# Altium PCB BOOST_PCB1.PcbDoc
Units mm, origin at the board's own origin, x right, y up, seen from the top; angles counter-clockwise.
Board outline 152.4 x 101.6 mm, 2 copper layers (Top Layer, Bottom Layer); 23 components, 16 nets, 64 pads, 0 vias.
Unrouted connection lines stored in the file: 40.
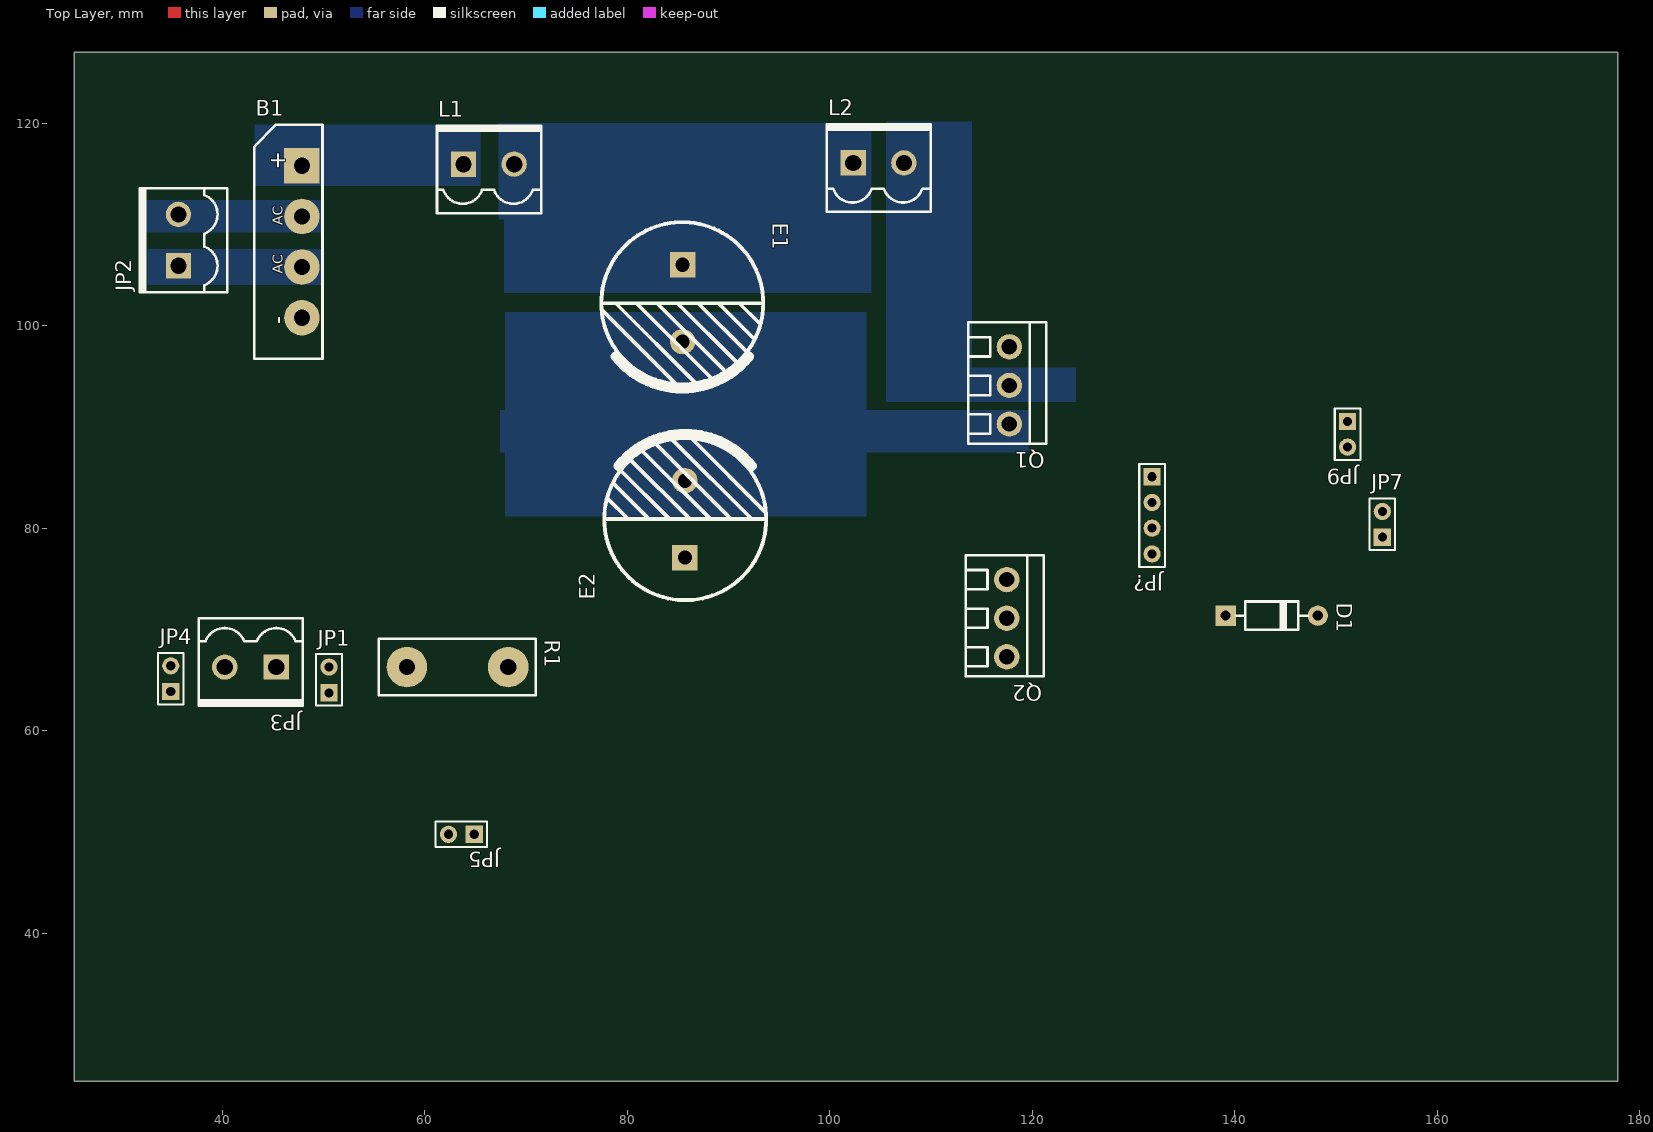
[diagram p0: Top Layer view]
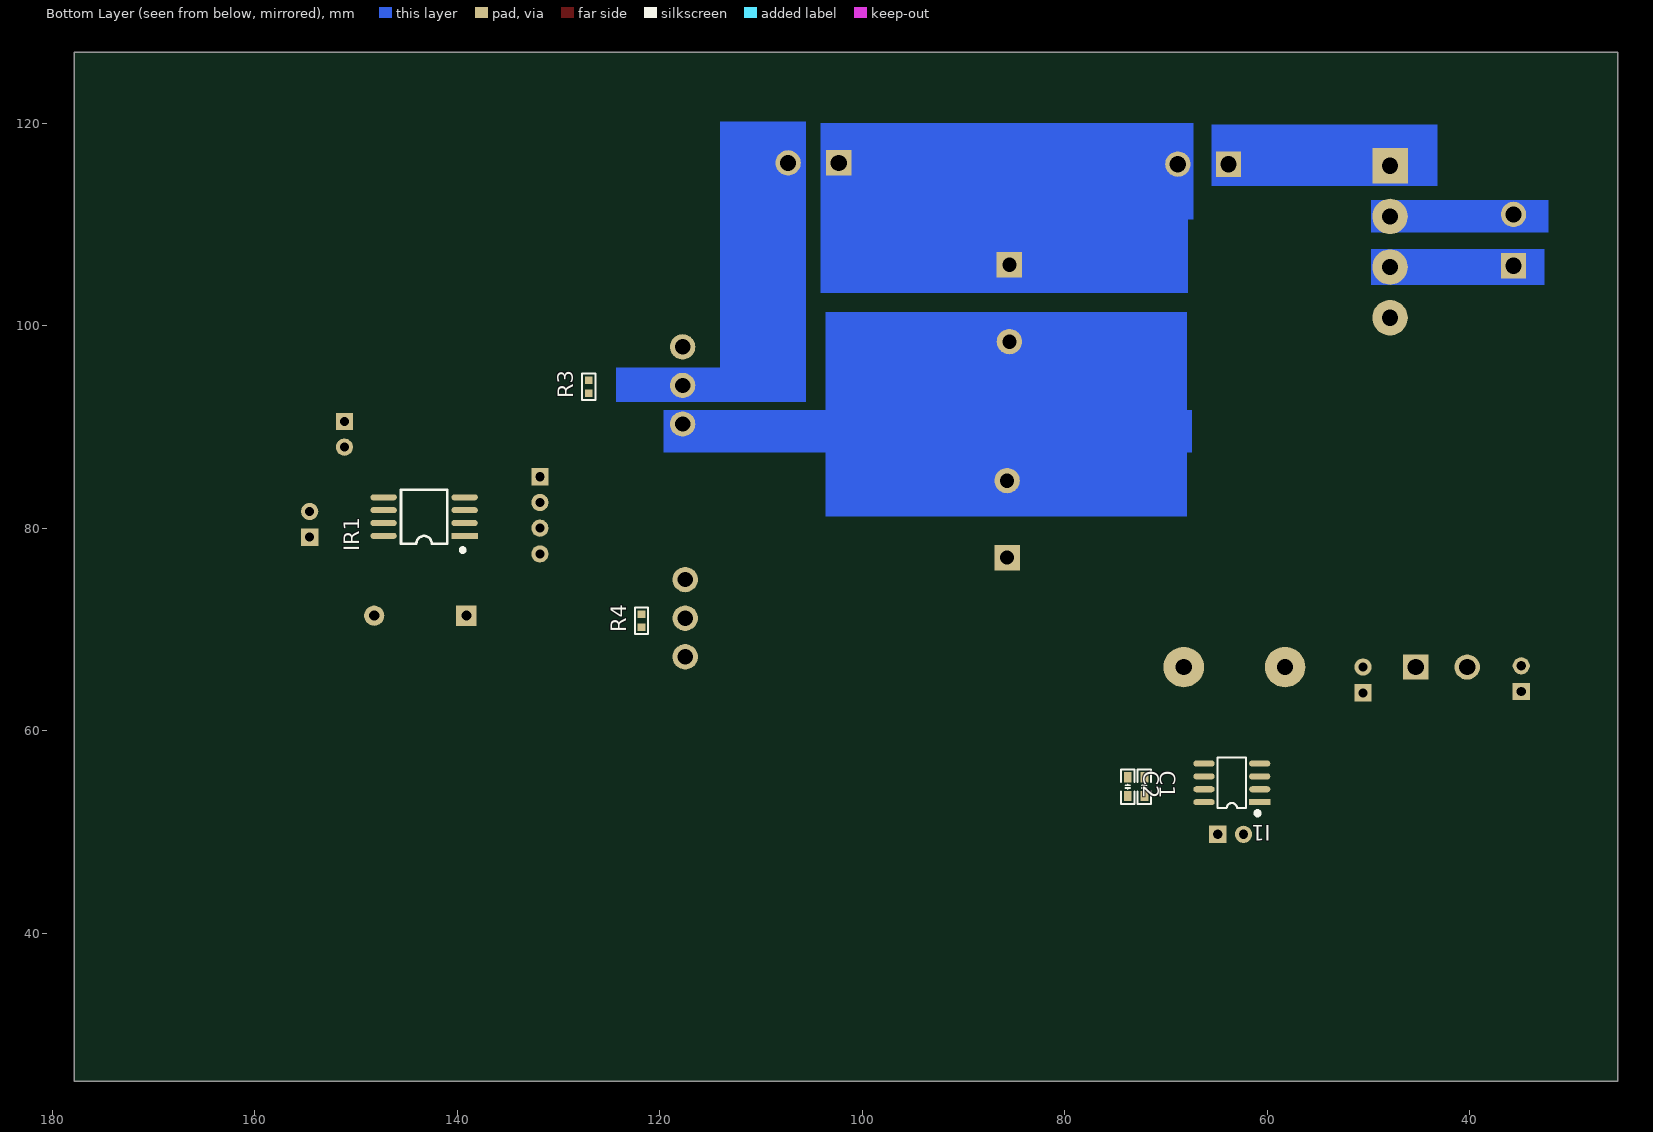
[diagram p1: Bottom Layer view, seen from below]

## Layer stack, top to bottom
Top Solder: solder mask 0.0102, Solder Resist, Dk 3.5
Top Layer: signal copper 0.0356
Dielectric 1: dielectric 0.32, FR-4, Dk 4.8
Bottom Layer: signal copper 0.0356
Bottom Solder: solder mask 0.0102, Solder Resist, Dk 3.5

## Board outline
25.4,25.4 177.8,25.4 177.8,127 25.4,127

## Design rules (kind name [scope] priority, off if disabled: settings)
Clearance [All] p1: gap=0.7
PolygonConnect [All] p1: connectstyle=Relief reliefconductorwidth=0.254 reliefentries=4 polygonreliefangle="90 Angle" airgapwidth=0.254
RoutingVias [All] p1: holewidth=0.711 width=1.27 viastyle="Through Hole" minholewidth=0.711 minwidth=1.27 maxholewidth=0.711 maxwidth=1.27
SolderMaskExpansion [All] p1: expansion=0.102
Width [All] p1: maxlimit=100 minlimit=1 preferedwidth=10
30 further rules are at their usual default settings.

## Components (designator, comment, footprint, x,y, rotation, side; value= is the part's Value field where it differs from the comment)
B1 "KBU808" KBU 47.879,108.291 r90 top
C1 "0.1u" "C 0603_M" 72.136,54.483 r270 bottom
C2 "10u" "C 0603_M" 73.787,54.483 r270 bottom
D1 "1N4007" DO-41 143.637,71.374 r0 top
E1 "10uF/16V" "CAP 7.5*16*25 - BK" 85.433,102.225 r270 top
E2 "4700uF/16V" "CAP 7.5*16*25 - BK" 85.725,80.899 r90 top
I1 "INA282" SOP8_M 63.5,54.864 r0 bottom
IR1 "IR2101/2303" SOP8W_M 143.256,81.153 r0 bottom
JP1 "HDR-1X2" HDR2.54-LI-2P 50.546,65.024 r90 top
JP2 "HDR-1X2" KF2EDGK5.08-LI-2P 35.687,108.458 r90 top
JP3 "HDR-1X2" KF2EDGK5.08-LI-2P 42.799,66.294 r180 top
JP4 "HDR-1X2" HDR2.54-LI-2P 34.925,65.151 r90 top
JP5 "HDR-1X2" HDR2.54-LI-2P 63.627,49.784 r180 top
JP7 "HDR-1X2" HDR2.54-LI-2P 154.559,80.391 r90 top
JP9 "HDR-1X2" HDR2.54-LI-2P 151.13,89.281 r270 top
JP? "HDR-1X4" HDR2.54-LI-4P 131.826,81.28 r270 top
L1 "33uH" KF2EDGK5.0-LI-2P 66.334,115.951 r0 top
L2 "33uH" KF2EDGK5.0-LI-2P 104.815,116.078 r0 top
Q1 "IRF840" KF128-3.81-3P 117.729,94.107 r270 top
Q2 "IRF840" KF128-3.81-3P 117.475,71.12 r270 top
R1 "0.01R" RX10-18*15*5 63.246,66.294 r0 top
R3 "10K" "R 0603_L" 127,93.98 r90 bottom
R4 "10K" "R 0603_L" 121.793,70.866 r90 bottom

## Footprints (in the part's own frame and the unit in brackets; to place one, negate y for a bottom-side part, rotate by r counter-clockwise, add the part's x,y. Pads: shape width x height; smd on the part's side, far side on the other; paste and mask are expansions set on the pad)
"C 0603_M" [mil] "无极性贴片电容"
  rect 40x30 smd: 1(-36.5,0) 2(36.5,0)
  silkscreen extent -68,-26 68,26, body extent -31,-16 31,16, height 32
"CAP 7.5*16*25 - BK" [mm] "脚距7.5mm直径16mm高度25mm"
  rect 2.5x2.5 hole 1.4: 1(-3.8,0.038)
  round 2.5 hole 1.4: 2(3.8,0.038)
  silkscreen extent -8,-8 8.42,8, body extent -8,-8 8.01,8, height 25.04
DO-41 [mm] "2.6*9.1mm(直径，脚距）"
  rect 2x2 hole 1: 1(-4.55,0)
  round 2 hole 1: 2(4.55,0)
  silkscreen extent -3.56,-1.4 3.56,1.4, body extent -4.92,-1.29 4.98,1.31, height 2.65
HDR2.54-LI-2P [mm] "排针，2脚"
  rect 1.7x1.7 hole 0.9: 1(-1.27,0)
  round 1.7 hole 0.9: 2(1.27,0)
  silkscreen extent -2.54,-1.27 2.54,1.27, body extent -2.54,-1.27 2.54,1.27, height 8.5
HDR2.54-LI-4P [mm] "排针，4脚"
  rect 1.7x1.7 hole 0.9: 1(-3.81,0)
  round 1.7 hole 0.9: 2(-1.27,0) 3(1.27,0) 4(3.81,0)
  silkscreen extent -5.08,-1.27 5.08,1.27, body extent -5.08,-1.27 5.08,1.27, height 8.5
KBU [mm] "23*6.6*19.1mm(长宽高)"
  round 3.5 hole 1.6: AC1(2.5,0) AC2(-2.5,0) DC-(-7.5,0)
  rect 3.5x3.5 hole 1.6: DC+(7.5,0)
  silkscreen extent -11.56,-2.03 11.56,4.7, body extent -11.5,-2 11.5,4.6, height 19
KF2EDGK5.0-LI-2P [mm] "立插端子"
  rect 2.5x2.5 hole 1.6: 1(-2.5,0)
  round 2.5 hole 1.6: 2(2.5,0)
  silkscreen extent -5.12,-4.83 5.17,3.81, body extent -5.04,-4.75 5.04,3.75, height 11.25
KF2EDGK5.08-LI-2P [mm] "立插端子"
  rect 2.5x2.5 hole 1.6: 1(-2.54,0)
  round 2.5 hole 1.6: 2(2.54,0)
  silkscreen extent -5.16,-4.83 5.13,3.81, body extent -5.08,-4.75 5.08,3.75, height 11.25
KF128-3.81-3P [mm] "螺钉式接线端子，脚距3.81mm"
  round 2.5 hole 1.5: 1(-3.81,0) 2(0,0) 3(3.81,0)
  silkscreen extent -6.22,-4.04 5.74,3.63, body extent -6.21,-3.9 5.72,3.5, height 8.55
"R 0603_L" [mil] "1/10W贴片电阻"
  rect 30x30 smd: 1(-25.59,0) 2(25.59,0)
  silkscreen extent -51,-26 51,26, body extent -31,-16 31,16, height 16
RX10-18*15*5 [mm] "18*15*5MM(长*宽*厚)"
  round 4 hole 1.6: 1(-5,0) 2(5,0)
  silkscreen extent -7.79,-2.79 7.7,2.79, body extent -7.5,-2.5 7.5,2.5, height 18.05
SOP8_M [mm] "5*6*1.8mm（长宽高）"
  rect 2.1x0.6 smd: 1(-2.75,1.905)
  oval 2.1x0.6 smd: 2(-2.75,0.635) 3(-2.75,-0.635) 4(-2.75,-1.905) 5(2.75,-1.905) 6(2.75,-0.635) 7(2.75,0.635) 8(2.75,1.905)
  silkscreen extent -2.69,-2.5 1.4,3.15, body extent -3,-2.5 3,2.5, height 1.9
SOP8W_M [mm] "5.3*8.3*1.8mm（长宽高）"
  rect 2.6x0.6 smd: 1(-4,1.905)
  oval 2.6x0.6 smd: 2(-4,0.635) 3(-4,-0.635) 4(-4,-1.905) 5(4,-1.905) 6(4,-0.635) 7(4,0.635) 8(4,1.905)
  silkscreen extent -3.94,-2.67 2.29,3.43, body extent -3.94,-2.64 3.94,2.64, height 1.9

## Part data
B1: library part KBU, "800V/8A整流桥"
C1 C2: library part C, "无极性贴片电容"
D1: "整流二极管"
E1 E2: library part C-CAP, "直插电解电容"
JP1 JP2 JP3 JP4 JP5 JP7 JP9: library part "Header 2", "2P接插件"
JP?: library part "Header 4", "4P接插件"
L1 L2: library part L-MR, "功率磁环电感"
Q1 Q2: "N沟场效应管"
R1: library part RX, "大功率电阻"
R3 R4: library part R, "贴片电阻"

## Nets (pads, with @x,y where several pads share a name; then routed paths per layer and width w, separated by ;. In a path a pad name is that pad's centre, name@x,y a point inside that pad or via, vN(x,y) a via of type N, cw(c..) or ccw(c..) an arc to the next point about the centre after c; other vN are vias at no path point)
+IN: E2.1 I1.8 JP5.1 Q2.2 R1.2
-IN: I1.1 JP1.1 JP1.2 JP3.1 JP5.2 R1.1
GND: C1.2 C2.2 I1.2 I1.3 I1.4 I1.7 IR1.4 JP9.2 JP?.1
HO: IR1.7 JP7.1 Q2.1 R4.2
I_ADC: I1.5
LO: IR1.5 JP9.1 Q1.1 R3.2
NetB1_AC1: B1.AC1 JP2.2
NetB1_AC2: B1.AC2 JP2.1
NetB1_DC+: B1.DC+ L1.1
NetD1_2: D1.2 IR1.8
NetE1_1: E1.1 L1.2 L2.1
PGND: B1.DC- E1.2 E2.2 JP3.2 JP4.1 JP4.2 Q1.3 R3.1
PWM1: IR1.2 JP?.3
PWM2: IR1.3 JP?.2
VCC_15: C1.1 C2.1 D1.1 I1.6 IR1.1 JP?.4
VS: IR1.6 JP7.2 L2.2 Q1.2 Q2.3 R4.1

## Other copper
Bottom Layer:
  rectangle net PGND: 67.945,81.153 103.632,101.346
  rectangle net PGND: 67.437,87.503 119.634,91.694
  rectangle net NetE1_1: 67.818,103.251 104.14,112.268
  rectangle net VS: 105.537,92.456 124.333,95.885
  rectangle net VS: 105.537,92.964 114.046,120.142
  rectangle net NetE1_1: 67.31,110.49 104.14,120.015
  rectangle net NetB1_DC+: 43.18,113.792 65.532,119.888
  rectangle net NetB1_AC2: 32.639,104.013 49.784,107.569
  rectangle net NetB1_AC1: 32.258,109.22 49.784,112.395

## Text inside footprints (layer, text, board x,y; h text height)
B1: Top Overlay "+" at 46.228,115.403 h1.6 r90; Top Overlay "-" at 46.228,100.163 h1.6 r90; Top Overlay "AC" at 45.974,105.116 h1 r90; Top Overlay "AC" at 45.974,109.942 h1 r90